# Altium PCB AQM_PCB.PcbDoc
Units mm, origin at the board's own origin, x right, y up, seen from the top; angles counter-clockwise.
Board outline 105 x 56 mm, 2 copper layers (Top Layer, Bottom Layer); 93 components, 68 nets, 343 pads, 94 vias.
Unrouted connection lines stored in the file: 19.
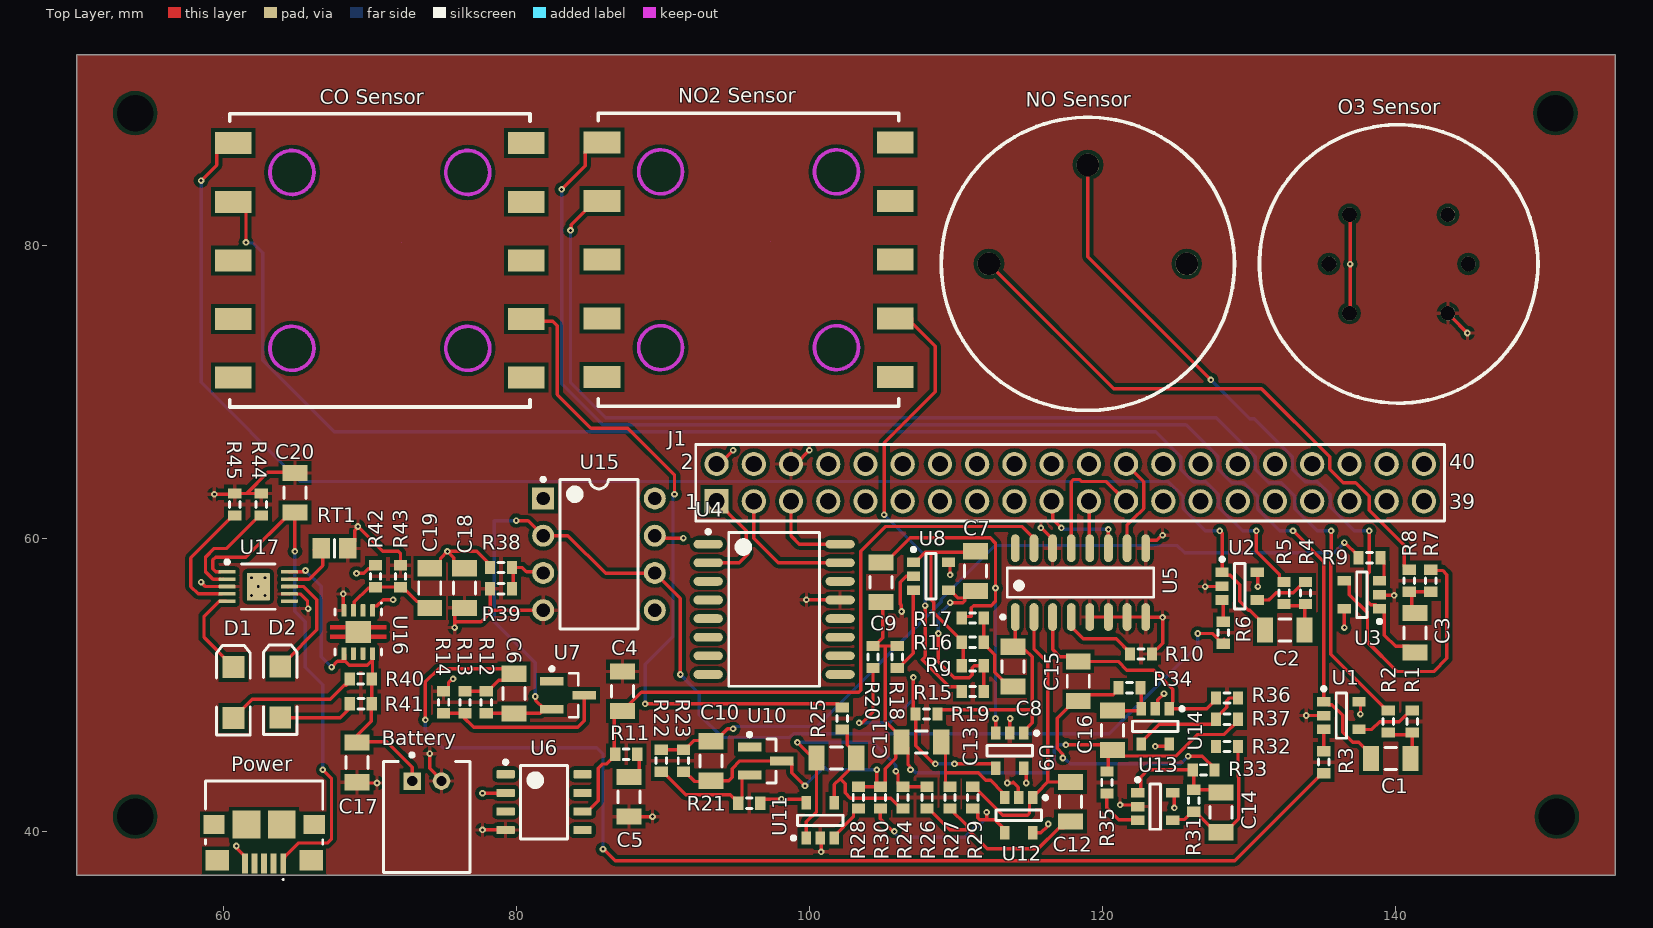
[diagram p0: Top Layer view]
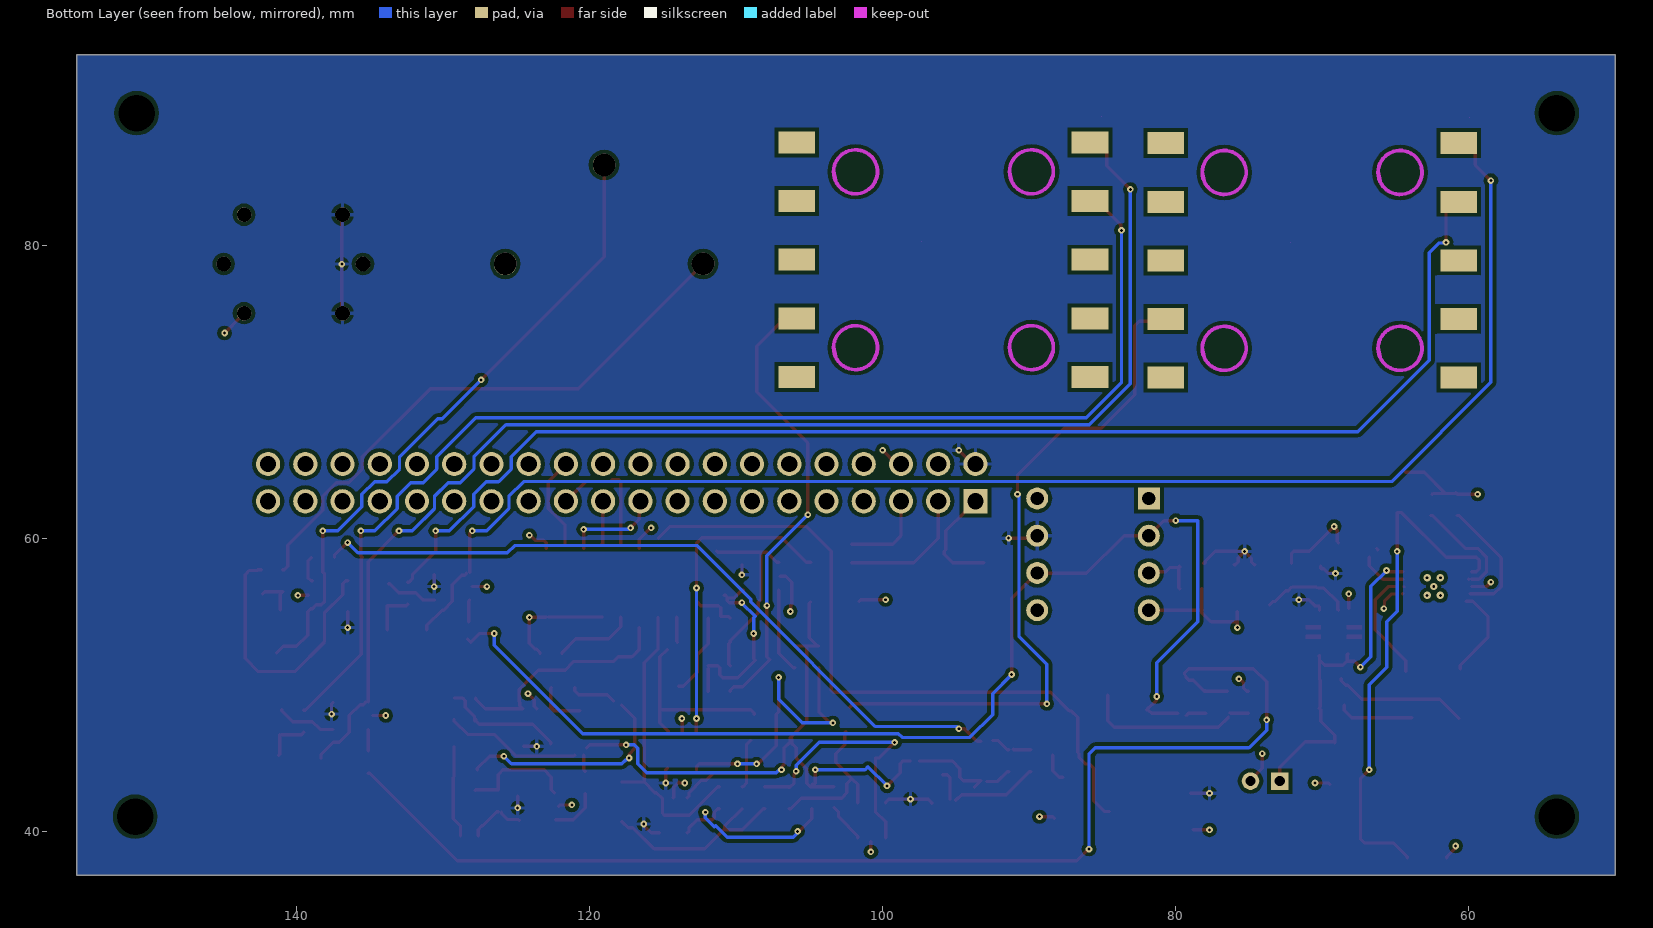
[diagram p1: Bottom Layer view, seen from below]

## Layer stack, top to bottom
Top Solder: solder mask 0.0102, Solder Resist, Dk 3.5
Top Layer: signal copper 0.0356
Dielectric 1: dielectric 0.32, FR-4, Dk 4.8
Bottom Layer: signal copper 0.0356
Bottom Solder: solder mask 0.0102, Solder Resist, Dk 3.5

## Board outline
50,93 155,93 155,37 50,37

## Design rules (kind name [scope] priority, off if disabled: settings)
Clearance [All] p1: gap=0.254 ignorepadtopadclearanceinfootprint=FALSE except(0: Arc-Hole Track-Hole SMDPad-Hole THPad-Hole Via-Hole Fill-Hole Poly-Hole Region-Hole Text-Hole)
DiffPairsRouting [All] p1: maxlimit=0.229 minlimit=0.229 mostfreqgap=0.229 toplayer_minwidth=0.229 toplayer_maxwidth=0.229 toplayer_prefwidth=0.229 bottomlayer_minwidth=0.229 bottomlayer_maxwidth=0.229 bottomlayer_prefwidth=0.229 maxuncoupledlength=12.7
PolygonConnect [All] p1: connectstyle=Relief reliefconductorwidth=0.254 reliefentries=4 polygonreliefangle="90 Angle" airgapwidth=0.254
RoutingVias [All] p1: holewidth=0.2 width=0.45 viastyle="Through Hole" minholewidth=0.2 minwidth=0.45 maxholewidth=0.2 maxwidth=0.45
SolderMaskExpansion [All] p1: expansion=0.102 istentingtop=FALSE
Width [All] p1: maxlimit=0.229 minlimit=0.229 preferedwidth=0.229 minimp=50.000000 maximp=50.000000 favimp=50.000000
29 further rules are at their usual default settings.

## Classes and differential pairs
component class "NO Output Processing": C14 C15 C16 R31 R32 R33 R34 R35 R36 R37 U13 U14
component class "300mV Ref Voltage": C10 R21 R22 R23 U10
component class "ADC + Pi": C4 C5 J1 R11 U4 U5 U6
component class O3: R10
component class NO: C3 "NO Sensor" R7 R8 R9 U3
component class NO2: C1 "NO2 Sensor" R1 R2 R3 U1
component class CO: C2 "CO Sensor" R4 R5 R6 U2
component class "Virtual Ground": R38 R39 U15
component class "NO2 Output Processing": C7 C8 C9 R15 R16 R17 R18 R19 R20 Rg U8 U9
component class "CO Output Processing": C11 C12 C13 R24 R25 R26 R27 R28 R29 R30 U11 U12
component class Battery: Battery C17 C18 C19 C20 D1 D2 Power R40 R41 R42 R43 R44 R45 RT1 U16 U17
component class "-200mV Ref Voltage": C6 R12 R13 R14

## Components (designator, comment, footprint, x,y, rotation, side; value= is the part's Value field where it differs from the comment)
Battery "S2B-PH-K-S(LF)(SN)" JST-S2B-PH-K-S_V 73.9,40.978 r0 top (schematic designator "Battery Connector")
C1 "Cap Semi" C1206 139.668,44.97 r0 top value=100nF
C2 "Cap Semi" C1206 132.445,53.75 r0 top value=100nF
C3 "Cap Semi" C1206 141.329,53.541 r90 top value=100nF
C4 "Cap Semi" C1206 87.254,49.56 r270 top value=10uF
C5 "Cap Semi" C1206 87.7,42.352 r90 top value=47uF
C6 "Cap Semi" C1206 79.854,49.4 r90 top value=100nF
C7 "Cap Semi" C1206 111.329,57.758 r90 top value=100nF
C8 "Cap Semi" C1206 113.9,51.24 r90 top value=10nF
C9 "Cap Semi" C1206 104.9,57 r90 top value=10nF
C10 "Cap Semi" C1206 93.3,44.8 r90 top value=100nF
C11 "Cap Semi" C1206 101.85,45 r180 top value=100nF
C12 "Cap Semi" C1206 117.808,42.02 r90 top value=10nF
C13 "Cap Semi" C1206 107.645,46.095 r0 top value=10nF
C14 "Cap Semi" C1206 128.083,41.29 r90 top value=100nF
C15 "Cap Semi" C1206 118.345,50.24 r90 top value=10nF
C16 "Cap Semi" C1206 120.67,46.886 r90 top value=10nF
C17 "Cap Semi" C1206 69.143,44.7 r90 top value=1uF
C18 "Cap Semi" C1206 76.464,56.6 r90 top value=1uF
C19 "Cap Semi" C1206 74.1,56.6 r90 top value=1uF
C20 "Cap Semi" C1206 64.9,63.1 r270 top value=1uF
"CO Sensor" "CO Sensor" Spec_Sensor 70.945,78.954 r0 top (schematic designator "CO Sensor1")
D1 "LED2" 3.2X1.6X1.1 60.704,49.471 r90 top
D2 "LED2" 3.2X1.6X1.1 63.9,49.5 r90 top
J1 "61304021121" 61304021121 117.799,63.789 r0 top
"NO2 Sensor" "NO2 Gas Sensor" Spec_Sensor 96.1,79 r0 top (schematic designator NO1)
"NO Sensor" "NO Sensor" NO_Sensor 119,78.719 r0 top (schematic designator "NO Sensor1")
"O3 Sensor" "O3 Sensor" O3_Sensor 140.208,78.71 r0 top (schematic designator O1)
Power "1981568-1" TECO-1981568-5_V 62.8,37.799 r180 top (schematic designator "USB Port")
R1 "Res3" J1-0603 141.129,47.5 r270 top value=10K
R2 "Res3" J1-0603 139.5,47.5 r90 top value=10K
R3 "Res3" J1-0603 135.1,44.72 r90 top value=10K
R4 "Res3" J1-0603 133.845,56.254 r270 top value=10K
R5 "Res3" J1-0603 132.391,56.254 r90 top value=10K
R6 "Res3" J1-0603 128.245,53.554 r90 top value=10K
R7 "Res3" J1-0603 142.4,57.096 r270 top value=10K
R8 "Res3" J1-0603 140.929,57.096 r90 top value=10K
R9 "Res3" J1-0603 138.225,58.671 r0 top value=10K
R10 "Res3" J1-0603 122.627,52.1 r180 top value=100K
R11 "Res3" J1-0603 87.5,45.256 r180 top value=1K
R12 "Res3" J1-0603 77.954,48.8 r270 top value=1.2K
R13 "Res3" J1-0603 76.5,48.8 r90 top value=6.2K
R14 "Res3" J1-0603 75.045,48.8 r270 top value=4.7K
R15 "Res3" J1-0603 111.145,49.537 r0 top value=150
R16 "Res3" J1-0603 111.145,52.9 r0 top value=10K
R17 "Res3" J1-0603 111.145,54.554 r180 top value=10K
R18 "Res3" J1-0603 106,51.9 r270 top value=150
R19 "Res3" J1-0603 108,48 r0 top value=20K
R20 "Res3" J1-0603 104.345,51.9 r270 top value=1K
R21 "Res3" J1-0603 95.9,41.921 r180 top value=4.7K
R22 "Res3" J1-0603 89.9,44.821 r90 top value=6.8K
R23 "Res3" J1-0603 91.404,44.821 r270 top value=2.2K
R24 "Res3" J1-0603 106.383,42.3 r90 top value=100K
R25 "Res3" J1-0603 102.245,47.7 r270 top value=150
R26 "Res3" J1-0603 108.037,42.3 r270 top value=10K
R27 "Res3" J1-0603 109.591,42.3 r90 top value=10K
R28 "Res3" J1-0603 103.345,42.3 r270 top value=150
R29 "Res3" J1-0603 111.145,42.3 r90 top value=20K
R30 "Res3" J1-0603 104.845,42.3 r270 top value=10K
R31 "Res3" J1-0603 126.229,42.09 r90 top value=10K
R32 "Res3" J1-0603 128.5,45.79 r0 top value=150
R33 "Res3" J1-0603 126.9,44.195 r0 top value=10K
R34 "Res3" J1-0603 121.85,49.79 r0 top value=10K
R35 "Res3" J1-0603 120.3,43.332 r270 top value=150
R36 "Res3" J1-0603 128.5,49.099 r180 top value=10K
R37 "Res3" J1-0603 128.5,47.645 r180 top value=10K
R38 "Res3" J1-0603 78.968,57.999 r180 top value=100K
R39 "Res3" J1-0603 78.968,56.545 r0 top value=100K
R40 "Res3" J1-0603 69.388,50.4 r0 top value=976K
R41 "Res3" J1-0603 69.4,48.7 r0 top value=976K
R42 "Res3" J1-0603 70.4,57.4 r90 top value=79K
R43 "Res3" J1-0603 72.1,57.4 r270 top value=25K
R44 "Res3" J1-0603 62.6,62.3 r270 top value=1K
R45 "Res3" J1-0603 60.8,62.3 r270 top value=2K
Rg "Res3" J1-0603 111.145,51.291 r180 top value=100K (schematic designator R_gain_NO2)
RT1 "Res Thermal" 6-0805_N 67.6,59.3 r0 top
U1 "MCP601T-I/OT" SOT-23-OT5_L 136.3,47.9 r0 top
U2 "MCP601T-I/OT" SOT-23-OT5_L 129.362,56.733 r0 top
U3 "MCP601T-I/OT" SOT-23-OT5_L 137.7,56.141 r180 top
U4 "DS3231SN" W16-H2_L 97.6,55.148 r0 top
U5 "MCP3008-I/SL" SOIC-SL16_L 118.5,56.97 r90 top
U6 "REF5025AIDR" D0008A_L 81.9,41.99 r0 top
U7 "LM4041CIM3-ADJ/NOPB" MF03A_M 83.533,49.284 r0 top
U8 "MCP601T-I/OT" SOT-23-OT5_L 108.3,57.4 r0 top
U9 "MCP601T-I/OT" SOT-23-OT5_L 113.679,45.5 r270 top
U10 "LM4041CIM3-ADJ/NOPB" MF03A_M 97.02,44.8 r0 top
U11 "MCP601T-I/OT" SOT-23-OT5_L 100.745,40.746 r90 top
U12 "MCP601T-I/OT" SOT-23-OT5_L 114.279,41.1 r270 top
U13 "MCP601T-I/OT" SOT-23-OT5_L 123.6,41.69 r0 top
U14 "MCP601T-I/OT" SOT-23-OT5_L 123.6,47.161 r270 top
U15 "LM741CN/NOPB" P0008A 85.647,58.899 r0 top
U16 "TPS73701DRBR" DRB0008A_V 69.22,53.6 r270 top
U17 "BQ24092DGQT" DGQ0010D_L 62.4,56.7 r0 top

## Footprints (in the part's own frame and the unit in brackets; to place one, negate y for a bottom-side part, rotate by r counter-clockwise, add the part's x,y. Pads: shape width x height; smd on the part's side, far side on the other; paste and mask are expansions set on the pad)
3.2X1.6X1.1 [mm] "SMT LED; 2 Flat Leads"
  rect 1.5x1.5 smd: 1(-1.75,0) 2(1.75,0)
  silkscreen extent -2.9,-1.15 3.2,1.15
6-0805_N [mm] "Chip Resistor, Body 2.0x1.2mm, IPC Medium Density"
  rect 1.2x1.4 smd: 1(-0.9,0) 2(0.9,0)
  silkscreen extent 0,-0.6 0,0.6, body extent -1.07,-0.7 1.07,0.7, height 0.7
61304021121 [mm] "Pin Header, pitch 2.54 mm, THT, Vertical, dual row, 40p"
  rect 1.65x1.65 hole 1.1: 1(-24.13,-1.27)
  round 1.65 hole 1.1: 2(-24.13,1.27) 3(-21.59,-1.27) 4(-21.59,1.27) 5(-19.05,-1.27) 6(-19.05,1.27) 7(-16.51,-1.27) 8(-16.51,1.27) 9(-13.97,-1.27) 10(-13.97,1.27) 11(-11.43,-1.27) 12(-11.43,1.27) 13(-8.89,-1.27) 14(-8.89,1.27) 15(-6.35,-1.27) 16(-6.35,1.27) 17(-3.81,-1.27) 18(-3.81,1.27) 19(-1.27,-1.27) 20(-1.27,1.27) 21(1.27,-1.27) 22(1.27,1.27) 23(3.81,-1.27) 24(3.81,1.27) 25(6.35,-1.27) 26(6.35,1.27) 27(8.89,-1.27) 28(8.89,1.27) 29(11.43,-1.27) 30(11.43,1.27) 31(13.97,-1.27) 32(13.97,1.27) 33(16.51,-1.27) 34(16.51,1.27) 35(19.05,-1.27) 36(19.05,1.27) 37(21.59,-1.27) 38(21.59,1.27) 39(24.13,-1.27) 40(24.13,1.27)
  silkscreen extent -25.55,-2.61 25.55,2.61, body extent -25.4,-2.54 25.4,2.54, height 8.59
C1206 [mm] "Chip Capacitor, Body 3.2x1.6mm, IPC High Density"
  rect 1.1x1.7 smd: 1(-1.35,0) 2(1.35,0)
  silkscreen extent -0.4,-0.75 0.4,0.75, body extent -1.7,-0.9 1.7,0.9, height 1.3
D0008A_L [mm] "SOIC, 8-Leads, Body 5x4mm, Pitch 1.27mm, IPC High Density"
  rrect18% 1.25x0.55 smd: 1(-2.625,1.905) 2(-2.625,0.635) 3(-2.625,-0.635) 4(-2.625,-1.905) 5(2.625,-1.905) 6(2.625,-0.635) 7(2.625,0.635) 8(2.625,1.905)
  silkscreen extent -2.75,-2.5 1.6,2.85, body extent -3,-2.45 3,2.45, height 1.63
DGQ0010D_L [mm] "TSOP, 10-Leads, Body 3.1x3.1mm, Pitch 0.5mm, Thermal Pad 1.88x1.57mm, IPC High Density"
  rrect40% 1.15x0.25 smd: 1(-2.125,1) 2(-2.125,0.5) 3(-2.125,0) 4(-2.125,-0.5) 5(-2.125,-1) 6(2.125,-1) 7(2.125,-0.5) 8(2.125,0) 9(2.125,0.5) 10(2.125,1)
  rrect6% 1.57x1.88 smd: 11(0,0)
  silkscreen extent -2.25,-1.55 1.15,1.8, body extent -2.45,-1.5 2.45,1.5, height 0.94
DRB0008A_V [mm] "SON, 8-Leads, Body 3x3mm, Pitch 0.65mm, Thermal Pad 1.50 x 3.8mm"
  rrect29% 0.85x0.35 smd: 1(-1.475,0.975) 2(-1.475,0.325) 3(-1.475,-0.325) 4(-1.475,-0.975) 5(1.475,-0.975) 6(1.475,-0.325) 7(1.475,0.325) 8(1.475,0.975)
  rrect7% 1.5x1.75 smd: 9(0,0)
  Top Layer region: 0.185,0.875 0.185,1.9 0.465,1.9 0.465,0.875
  Top Layer region: -0.185,-0.875 -0.185,-1.9 -0.465,-1.9 -0.465,-0.875
  Top Layer region: 0.185,-0.875 0.185,-1.9 0.465,-1.9 0.465,-0.875
  Top Layer region: -0.185,0.875 -0.185,1.9 -0.465,1.9 -0.465,0.875
  silkscreen extent -2.02,-1.58 1.57,1.62, body extent -1.5,-1.5 1.5,1.5, height 1
J1-0603 [mm] "Chip Resistor, Body 1.6x0.8mm, IPC High Density"
  rect 0.7x0.9 smd: 1(-0.75,0) 2(0.75,0)
  silkscreen extent -0.2,-0.35 0.2,0.35, body extent -0.85,-0.48 0.85,0.48, height 0.9
JST-S2B-PH-K-S_V [mm] "THD, 2-Leads, Body 7.6x5.9mm, Pitch 2mm"
  rect 1.2x1.2 hole 0.7: 1(-1,2.45)
  round 1.2 hole 0.7: 2(1,2.45)
  silkscreen extent -2.95,-3.8 2.95,4.35, body extent -2.95,-3.8 2.95,3.8, height 4.8
MF03A_M [mm] "SOT23, 3-Leads, Body 2.9x1.3mm, Pitch 0.95mm, Lead Span 2.4mm, IPC Low Density"
  rect 1.6x0.6 smd: 1(-1.1,0.95) 2(-1.1,-0.95) 3(1.1,0)
  silkscreen extent -1.22,-1.5 0.7,1.92, body extent -0.7,-1.52 0.7,1.52, height 1.12
NO_Sensor [mm] "GS+4NO"
  round 1.55 hole 1.55: 1(-6.75,0) 2(0,6.75) 3(6.75,0)
  silkscreen extent -10,-10 10,10
O3_Sensor [mm] "MQ131"
  round 1 hole 1: 1(-3.359,3.359) 2(-4.75,0) 3(-3.359,-3.359) 4(3.359,-3.359) 5(4.75,0) 6(3.359,3.359)
  silkscreen extent -9.5,-9.5 9.5,9.5
P0008A [mm] "DIP, 8-Leads, Body 10.15x6.6mm, Pitch 2.54mm"
  rect 1.5x1.5 hole 0.9: 1(-3.81,3.81)
  round 1.5 hole 0.9: 2(-3.81,1.27) 3(-3.81,-1.27) 4(-3.81,-3.81) 5(3.81,-3.81) 6(3.81,-1.27) 7(3.81,1.27) 8(3.81,3.81)
  silkscreen extent -3.93,-5.1 2.65,5.23, body extent -3.95,-5.07 3.95,5.07, height 5.08
SOIC-SL16_L [mm] "SOIC, 16-Leads, Body 9.9x3.9mm, Pitch 1.27mm, IPC High Density"
  oval 1.9x0.6 smd: 1(-2.35,4.445) 2(-2.35,3.175) 3(-2.35,1.905) 4(-2.35,0.635) 5(-2.35,-0.635) 6(-2.35,-1.905) 7(-2.35,-3.175) 8(-2.35,-4.445) 9(2.35,-4.445) 10(2.35,-3.175) 11(2.35,-1.905) 12(2.35,-0.635) 13(2.35,0.635) 14(2.35,1.905) 15(2.35,3.175) 16(2.35,4.445)
  silkscreen extent -2.47,-5 1,5.42, body extent -2,-5 2,5, height 1.75
SOT-23-OT5_L [mm] "SOT23, 5-Leads, Body 2.9x1.7mm, Pitch 0.95mm, Lead Span 2.8mm, IPC High Density"
  rect 0.9x0.65 smd: 1(-1.2,0.95) 2(-1.2,0) 3(-1.2,-0.95) 4(1.2,-0.95) 5(1.2,0.95)
  silkscreen extent -1.32,-1.55 0.35,1.95, body extent -0.9,-1.55 0.9,1.55, height 1.45
Spec_Sensor [mm] "Spec sensor package"
  rect 2.5x1.5 all layers, no hole mask+0.25: 1(-10.25,-8) 2(-10.25,-4) 3(-10.25,0) 4(-10.25,4) 5(-10.25,8) 6(9.75,8) 7(9.75,4) 8(9.75,0) 9(9.75,-4) 10(9.75,-8)
  Keep-Out Layer circle w0.254: c5.75,-6 r1.5
  Keep-Out Layer circle w0.254: c5.75,6 r1.5
  Keep-Out Layer circle w0.254: c-6.25,6 r1.5
  Keep-Out Layer circle w0.254: c-6.25,-6 r1.5
  Keep-Out Layer region: -11,9.75
  Keep-Out Layer region: 5.75,-7.5 5.25,-7.5 5,-7.25 4.625,-6.875 4.25,-6 4.375,-5.375 5,-4.75 5.75,-4.5 6.75,-4.75 7.25,-5.583 7,-6.75 6.75,-7.25
  Keep-Out Layer region: 5.75,4.5 5.25,4.5 5,4.75 4.625,5.125 4.25,6 4.375,6.625 5,7.25 5.75,7.5 6.75,7.25 7.25,6.417 7,5.25 6.75,4.75
  Keep-Out Layer region: -6.25,4.5 -6.75,4.5 -7,4.75 -7.375,5.125 -7.75,6 -7.625,6.625 -7,7.25 -6.25,7.5 -5.25,7.25 -4.75,6.417 -5,5.25 -5.25,4.75
  Keep-Out Layer region: -6.25,-7.5 -6.75,-7.5 -7,-7.25 -7.375,-6.875 -7.75,-6 -7.625,-5.375 -7,-4.75 -6.25,-4.5 -5.25,-4.75 -4.75,-5.583 -5,-6.75 -5.25,-7.25
  Keep-Out Layer region: 1.25,1.25
  silkscreen extent -10.5,-10 10,10
TECO-1981568-5_V [mm] "SMD, 5-Leads, Body 8x5.9mm, Pitch 0.65mm"
  rect 0.4x1.35 smd: 1(-1.3,0) 2(-0.65,0) 3(0,0) 4(0.65,0) 5(1.3,0)
  rect 1.6x1.4 smd: 6(-3.2,-0.225) 7(3.2,-0.225)
  rect 1.45x1.3 smd: 8(-3.425,-2.675) 9(3.425,-2.675)
  rect 1.9x1.9 smd: 10(-1.2,-2.675) 11(1.2,-2.675)
  silkscreen extent -4,-5.62 4,1.12, body extent -4,-5.63 4,0.28, height 3
W16-H2_L [mm] "SOIC, 16-Leads, Body 10.3x7.5mm, Pitch 1.27mm, IPC High Density"
  oval 2x0.6 smd: 1(-4.5,4.445) 2(-4.5,3.175) 3(-4.5,1.905) 4(-4.5,0.635) 5(-4.5,-0.635) 6(-4.5,-1.905) 7(-4.5,-3.175) 8(-4.5,-4.445) 9(4.5,-4.445) 10(4.5,-3.175) 11(4.5,-1.905) 12(4.5,-0.635) 13(4.5,0.635) 14(4.5,1.905) 15(4.5,3.175) 16(4.5,4.445)
  silkscreen extent -4.62,-5.25 3.1,5.42, body extent -3.8,-5.25 3.8,5.25, height 2.65

## Part data
Battery: library part CMP-1755-00004-1, "Male Header, Pitch 2 mm, 1 x 2 Position, Height 4.8 mm, Tail Length 3.4 mm, -25 to 85 degC, RoHS, Bulk", Capacitance="10 uF", Case\Package=Radial, Max Operating Temperature="85 degC", Min Operating Temperature="-40 degC", Package Quantity=200, Tolerance=20%, Voltage Rating="50 V", ComponentLink1Description=Datasheet, ComponentLink1URL=http://www.jst-mfg.com/product/pdf/eng/ePH.pdf, DatasheetVersion=Dec-12, Diameter="5 mm", Height="11 mm", Lead Pitch="2 mm", Length="11 mm", Mount="Through Hole", PackageDescription="Male Header, Pitch 2 mm, 1 x 2 Position, Height 4.8 mm, Tail Length 3.4 mm", PackageReference=S2B-PH-K-S, Packaging=Bulk, Pins=2, Radiation Hardening=No, REACH SVHC="No SVHC", RoHSCompliant=true, Voltage Rating (DC)="50 V"
C1 C2 C3 C4 C5 C6 C7 C8 C9 C10 C11 C12 C13 C14 C15 C16 C17 C18 C19 C20: "Capacitor (Semiconductor SIM Model)", LatestRevisionDate=29-May-2009, LatestRevisionNote="IPC-7351 Footprint Added.", PackageDescription="Chip Capacitor", PackageReference=C1206, Published=8-Jun-2000, Publisher="Altium Limited"
"CO Sensor": library part 3SP_CO_1000, "3SP_CO_1000 Package 110-109"
D1 D2: "Typical RED, GREEN, YELLOW, AMBER GaAs LED", LatestRevisionDate=17-Jul-2002, LatestRevisionNote="Re-released for DXP Platform.", PackageDescription="SM LED; 2 Flat Leads", PackageReference=3.2X1.6X1.1, PackageVersion=Feb-2002, Published=8-Jun-2000, Publisher="Altium Limited"
J1: library part CMP-1502-01135-1, "THT Vertical Pin Header WR-PHD, Pitch 2.54 mm, Dual Row, 40 pins", Contact Resistance=20mOhm, Manufacturer="Wurth Elektronik", Operating Temperature=-40to105degC, Rated Current=3A, Withstanding Voltage=500VAC, Working Voltage=250VAC, Datasheet URL=https://katalog.we-online.de/em/datasheet/6130xx21121.pdf, Gender=Male, Manufacturer URL=http://www.we-online.de, Mounting Technology=THT, Orientation=Vertical, Package Reference=61304021121, Packaging=Bag, Part Number=61304021121, Pin Number=40, Pitch=2.54mm, Publisher=WurthElektronik, Row Number=Dual
"NO2 Sensor": library part "3SP_NO2_5F C", "3SP_NO2_5F C Package 110-508"
"NO Sensor": library part GS+4NO
"O3 Sensor": library part MQ131
Power: library part CMP-2000-05408-1, "Micro USB Receptacle Standard Type B Assy, 5-Pin SMD, RoHS, Tape and Reel", Current Rating (Max)=1/ContactA, Manufacturer="TE Connectivity", Operating Temp Range=-55Cto85C, Operating Temperature Max Deg. C=85C, Operating Temperature Min Deg. C=-55C, Voltage Rating Max=30VAC, Body Orientation=RightAngle, Contact Material=CopperAlloy, Contact Plating=GoldOverNickel, Datasheet URL=http://www.mouser.com/ds/2/418/NG_CD_1981568_E2-621296.pdf, Datasheet Version="Rev. E2, 08/2015", Gender=RCP, Housing Material=Thermoplastic, Manufacturer URL=http://www.te.com/, Mounting Style=SurfaceMount, Number of Contacts=5POS, Number of Ports=1Port, Number of Terminals=5, Packaging=TapeandReel, Pitch (mm)=0.65mm, Product Depth (mm)=5.6mm, Product Height (mm)=3mm, Product Length (mm)=8mm, Termination Method=Solder, Type=MicroUSB
R1 R2 R3 R4 R5 R6 R7 R8 R9 R10 R11 R12 R13 R14 R15 R16 R17 R18 R19 R20 R21 R22 R23 R24 R25 R26 R27 R28 R29 R30 R31 R32 R33 R34 R35 R36 R37 R38 R39 R40 R41 R42 R43 R44 R45 Rg: "Resistor", LatestRevisionDate=29-May-2009, LatestRevisionNote="IPC-7351 Footprint Added.", PackageDescription="Chip Resistor", PackageReference=J1-0603, Published=8-Jun-2000, Publisher="Altium Limited"
RT1: "Thermistor", Code_IPC=RESC2012, LatestRevisionDate=29-May-2009, LatestRevisionNote="IPC-7351 Footprint Added.", PackageDescription="Chip Resistor 0805 Case Size", PackageReference=6-0805, PackageVersion=Mar-2003, Published=24-Mar-1999, Publisher="Altium Limited"
U1 U2 U3 U8 U9 U11 U12 U13 U14: library part CMP-0187-00433-2, "2.7V to 6.0V Single Supply CMOS Operational Amplifier, 5-Pin SOT-23, Industrial Temperature, Tape and Reel", Code_IPC=SOT23-5, ComponentLink1Description="Manufacturer URL", ComponentLink1URL=http://www.microchip.com/, ComponentLink2Description=Datasheet, ComponentLink2URL=http://ww1.microchip.com/downloads/en/DeviceDoc/21314g.pdf, ComponentLink3Description="Package Specification", ComponentLink3URL=http://www.microchip.com/stellent/groups/techpub_sg/documents/packagingspec/en012702.pdf, DatasheetVersion="revG, Dec-2007", PackageDescription="5-Lead Plastic Small Outline Transistor (OT) [SOT-23]", PackageReference=SOT-23-OT5, PackageVersion="revBB, Aug-2009", RevisionNote="URLs added."
U4: library part CMP-0254-00293-1, "Extremely Accurate I2C-Integrated Real-Time Clock/TCXO/Crystal, 16-Pin SO, -40 to 85 degC", Code_IPC=SOIC127P1030-16, Code_JEDEC=MS-013-AA, ComponentLink1Description="Manufacturer URL", ComponentLink1URL=http://www.maxim-ic.com, ComponentLink2Description=Datasheet, ComponentLink2URL=http://datasheets.maxim-ic.com/en/ds/DS3231.pdf, ComponentLink3Description="Package Specification", ComponentLink3URL=http://pdfserv.maxim-ic.com/package_dwgs/21-0042.PDF, DatasheetVersion="Rev 8, Jul-2010", PackageDescription="16-Pin Small-Outline IC, Wide (0.3in), 1.27 mm Pitch, SOIC (W)", PackageReference=W16-H2, PackageVersion="revD, 2010"
U5: library part CMP-0188-00041-2, "2.7V 4-Channel/8-Channel 10-Bit A/D Converters with SPI Serial Interface, 16-Pin SOIC 150mil, Industrial Temperature", Code_IPC=SOIC127P600-16, Code_JEDEC=MS-012-AC, ComponentLink1Description="Manufacturer URL", ComponentLink1URL=http://www.microchip.com/, ComponentLink2Description=Datasheet, ComponentLink2URL=http://ww1.microchip.com/downloads/en/DeviceDoc/21295d.pdf, ComponentLink3Description="Package Specification", ComponentLink3URL=http://www.microchip.com/stellent/groups/techpub_sg/documents/packagingspec/en012702.pdf, DatasheetVersion="revD, Dec-2008", PackageDescription="16-Lead Plastic Small Outline (SL) - Narrow, 3.90mm Body [SOIC]", PackageReference=SOIC-SL16, PackageVersion="revBB, Aug-2009", RevisionNote="URLs added."
U6: library part CMP-0367-00041-2, "Low Noise, Very Low Drift, Precision Voltage Reference, -40 to 125 degC, 8-pin SOIC (D), Green (RoHS & no Sb/Br)", Manufacturer="Texas Instruments", Rating=Military, Temp Coeff(Max)(ppm/ degree C)=3, Code_JEDEC=MS-012, ComponentLink1Description="Manufacturer URL", ComponentLink1URL=http://www.ti.com/, ComponentLink2Description=Datasheet, ComponentLink2URL=http://www.ti.com/general/docs/lit/getliterature.tsp?genericPartNumber=REF5025&fileType=pdf, ComponentLink3Description="Package Specification", ComponentLink3URL=http://www.ti.com/litv/pdf/msoi002j, DatasheetVersion=SBOS410E, Eco-Plan="Green (RoHS & no Sb/Br)", Initial Accuracy @ 25/deg C(%)=0.05, Iout/Iz(Max)(mA)=10, Iq(Max)(uA)=1000, Mounting Technology="Surface Mount", PackageDescription="8-Pin Plastic Small Outline, Body 4.9 x 3.9 mm, Pitch 1.27 mm", PackageReference=D0008A, PackageVersion=4040047-3/M, PartNumber=REF5025AIDR, SubFamily="Series Voltage Reference", VI(Max)(V)=18, VI(Min)(V)=2.7, VO(V)=2.5
U7 U10: library part CMP-0074-00728-2, "Precision Micropower Shunt Voltage Reference, 3-pin SOT-23, Pb-Free", Manufacturer="National Semiconductor", PackageTopMarking=RAC*XTT, PowerWise=N, ComponentLink1Description="LM4041 Datasheet", ComponentLink1URL=http://www.national.com/ds/LM/LM4041.pdf, ComponentLink2Description="LM4041 Web Page", ComponentLink2URL=http://www.national.com/pf/LM/LM4041.html, ComponentLink3Description="MF03A Package Page", ComponentLink3URL=http://www.national.com/packaging/folders/mf03a.html, CompType="Voltage Reference IC", DatasheetVersion=Mar-2005, PackageDescription="Molded SOT-23, .115 x .051 x .037in Body, 3 Lead, .075 in Pitch", PackageReference=MF03A, PackageVersion="revB, Mar-2003", PinCount=3, RevisionNote="Component URLs added", RoHS=Y
U15: library part CMP-0055-00162-3, "Operational Amplifier, 8-pin MDIP, Pb-Free", Manufacturer="Texas Instruments", Package Reference=P0008A, PackageTopMarking=NSUZXYTTE#*LM*741CN, PowerWise=N, Code_JEDEC=MS-001-BA, ComponentLink1Description="Datasheet URL", ComponentLink1URL=http://www.ti.com/general/docs/lit/getliterature.tsp?genericPartNumber=LM741&fileType=pdf, CompType=Amplifiers, PackageDescription="MDIP, .365 x .250 x .130in, 8 Lead, .100in Pitch", PinCount=8, RoHS=Y
U16: library part CMP-0395-00601-2, "Single Output LDO, 1 A, Adjustable 1.2 to 5.5 V Output, 2.2 to 5.5 V Input, with Reverse Current Protection, 8-pin SON (DRB), -40 to 125 degC, Green (RoHS & no Sb/Br)", Manufacturer="Texas Instruments", Rating=Catalog, Accuracy(%)=3, ComponentLink1Description="Manufacturer URL", ComponentLink1URL=http://www.ti.com/, ComponentLink2Description=Datasheet, ComponentLink2URL=http://www.ti.com/general/docs/lit/getliterature.tsp?genericPartNumber=TPS73701&fileType=pdf, ComponentLink3Description="Package Specification", ComponentLink3URL=http://www.ti.com/litv/pdf/mpds118h, DatasheetVersion=SBVS067O, Eco-Plan="Green (RoHS & no Sb/Br)", Iout(Max)(A)=1, Iq(Typ)(mA)=0.3, Mounting Technology="Surface Mount", PackageDescription="8-Pin Plastic Small Outline, Body 3 x 3 mm, Pitch 0.65 mm", PackageReference=DRB0008A, PackageVersion=4203482-2/K, PartNumber=TPS73701DRBR, SubFamily="Single Channel LDO", Vdo(Typ)(mV)=130, Vin(Max)(V)=5.5, Vin(Min)(V)=2.2, Vout Adj(Max)(V)=5.5, Vout Adj(Min)(V)=1.2
U17: library part CMP-0321-00905-2, "1 A, Single-Input, Single-Cell Li-Ion Battery Charger with Operation Over JEITA and 10 k ohm NTC, 4.5 V, -40 to 150 degC, 10-pin MSOP-PowerPAD (DGQ), Green (RoHS & no Sb/Br)", Manufacturer="Texas Instruments", Over Voltage Protection=N, Code_JEDEC=MO-187-BA-T, ComponentLink1Description=Datasheet, ComponentLink1URL=http://www.ti.com/general/docs/lit/getliterature.tsp?genericPartNumber=BQ24092&fileType=pdf, DatasheetVersion=SLUS968C, Eco-Plan="Green (RoHS & no Sb/Br)", Lead Acid=N, Li-Ion=N, Li-Polymer=N, Mounting Technology="Surface Mount", NiCd=N, NiMH=N, PackageDescription="10-Pin PowerPAD Plastic Small Outline 0.5 mm Pitch, Exposed Pad", PackageReference=DGQ0010D, PackageVersion="revF, Nov-2011", PartNumber=BQ24092DGQT, SubFamily="Battery Charge Management", Vin(Min)(V)=4.5

## Free pads (board coordinates)
  round 1.524 hole 2.5 mask+2: 13(54,89) 13(54,41) 13(150.9,89) 13(151,41)

## Via types
v1: diameter 0.45, hole 0.2, Top Layer to Bottom Layer, 89 vias
v2: diameter 0.5, hole 0.2, Top Layer to Bottom Layer, 5 vias

## Nets (pads, with @x,y where several pads share a name; then routed paths per layer and width w, separated by ;. In a path a pad name is that pad's centre, name@x,y a point inside that pad or via, vN(x,y) a via of type N, cw(c..) or ccw(c..) an arc to the next point about the centre after c; other vN are vias at no path point)
GND: "O3 Sensor.4" Battery.2 C4.1 C5.1 C17.1 C18.1 C20.1 J1.6 Power.5 R10.1 R14.1 R39.1 R43.1 R44.1 R45.1 RT1.2 U1.2 U2.2 U3.2 U4.13 U5.5 U5.6 U5.7 U5.8 U5.9 U5.14 U6.4 U8.2 U9.2 U11.2 U12.2 U13.2 U14.2 U15.4 U16.4 U17.3 U17.7 | length 60
  Top Layer w0.229: v1(58.5,57) 58.8,56.7 U17.3@59.8,56.7 ; v1(59.4,63) 60.8,63 R45.1@60.85,63.05 ; R45.1 R45.1@60.85,63.05 ; v1(60.9,39) 60.942,38.958 60.942,38.832 61.5,38.275 Power.5@61.5,38.2 ; R45.1@60.9,63.1 R45.1@60.85,63.05 ; R44.1@62.5,63 62.45,63.05 61.6,63.05 ; C20.1@64.3,64.5 63.05,64.5 61.6,63.05 ; U17.7 U17.7@64.535,56.189 ; U17.7@64.9,56.2 64.911,56.189 65.311,56.189 65.758,55.742 65.758,55.242 v1(65.8,55.2) ; U16.4@68.2,55.2 v1(68.2,56.2) ; RT1.2@68.9,59.7 68.985,59.785 68.985,60.525 69.2,60.74 v1(69.2,60.8) 70.9,59.1 71.966,59.1 72.1,58.966 R43.1@72.1,58.3 ; C17.1@69.5,43.2 69.6,43.3 v1(70.5,43.3) ; v1(74.1,45.3) 74.1,44.3 Battery.2@74.9,43.5 ; R14.1 75.145,49.55 75.381,49.785 75.381,50.155 75.583,50.358 75.658,50.358 v1(75.7,50.4) ; v1(75.8,53.9) 75.8,54.3 ; C18.1@75.8,55 75.8,54.3 ; v1(77.7,40.1) U6.4@78.8,40.1 ; 78.2,55.1 78.211,55.089 78.218,55.089 ; R39.1 78.218,55.089 ; U15.4 78.218,55.089 ; C5.1@88.3,40.9 88.4,41 v1(89.3,41) ; J1.6 99.059,65.059 v1(100,66) ; v1(99.8,55.8) 101.5,55.8 U4.13@101.6,55.7 ; v1(100.8,38.6) U11.2@100.8,39.3 ; v1(106.3,55) 106.258,55.042 106.258,55.442 106.2,55.5 106.2,57 106.6,57.4 U8.2@107,57.4 ; v1(113.5,43.3) 113.86,43.3 113.9,43.34 114.247,42.993 114.247,42.332 U12.2 ; U9.2 113.679,47.598 113.681,47.6 v1@113.7,47.6 ; v1@115.9,60.7 115.888,60.688 115.888,60.644 116.595,59.938 U5.14 ; U5.5 U5.6 U5.7 U5.8@122.773,54.62 ; v1(121.2,41.8) 122,41.8 U13.2@122.1,41.7 ; U5.8 122.964,54.6 v1(124.1,54.6) ; U5.9 122.945,59.684 123.116,59.855 123.695,59.855 124.04,60.2 v1(124.1,60.2) ; R10.1 123.377,52.2 123.612,52.435 123.712,52.435 124.1,52.823 v1@124.1,54.5 ; U14.2 123.782,48.543 123.782,48.982 v1(124.2,49.4) ; v1(127,56.7) U2.2@128,56.7 ; v1(133.9,47.9) U1.2@134.8,47.9 ; U3.2@139.2,56.1 v1(139.9,56.1) ; 143.8,75.2 143.8,75.1 v1(144.9,74) ; R45.1@60.85,63.05 61.6,63.05 ; 75.8,54.3 77.6,54.3 78.218,54.918 78.218,55.089
  other v1: 113.7,47.7 115.8,60.7
NetBattery_1: Battery.1 C17.2 R40.2 R41.2 U16.5 U16.8 U17.10 | length 23.7
  Top Layer w0.229: U17.10 65.467,57.7 65.56,57.793 v1(65.62,57.793) ; v1(67.4,51.2) 67.404,51.2 67.804,51.6 68.3,51.6 ; U16.5 68.306,52.064 68.306,51.623 68.597,51.331 69.843,51.331 70.135,51.623 ; R40.2@70.138,50.3 70.195,50.356 70.195,51.623 70.195,51.895 U16.8@70.2,51.9 ; R41.2@70.15,48.5 R40.2@70.15,50.25 ; U16.8@70.195,51.995 U16.8@70.2,52 ; R41.2@70.2,48.4 70.1,48.3 70.1,47.5 69.143,46.543 C17.2 69.193,46.1 71.172,46.1 72.9,44.372 Battery.1
  Bottom Layer w0.229: v1(65.62,57.793) 66.7,56.713 66.7,51.9 v1(67.4,51.2)
NetC1_1: "NO2 Sensor.5" C1.1 U1.1 | length 91.2
  Top Layer w0.229: v1(83.1,83.8) 84.714,85.414 84.714,86.364 85.35,87 85.85,87 ; v1(133,60.5) 135.1,58.4 U1.1 ; U1.1@135.3,48.8 135.3,48.774 135.435,48.639 135.656,48.639 136.383,47.912 136.383,46.77 137.064,46.089 137.499,46.089 138.318,45.27 C1.1
  Bottom Layer w0.229: 83.1,70.845 83.1,70.545 ; v1(83.1,83.8) 83.1,70.545 ; v1(133,60.5) 132.1,60.5 130.576,62.024 130.576,62.86 129.647,63.789 128.812,63.789 127.883,64.717 127.883,65.553 125.7,67.737 85.909,67.737 83.1,70.545
NetC1_2: C1.2 R1.2 R2.1 | length 3
  Top Layer w0.229: R2.1 139.649,46.6 R1.2@141,46.6 ; R1.2@141.129,46.6 141.129,45.271 C1.2@141.2,45.2
NetC2_1: "CO Sensor.5" C2.1 U2.1 | length 99.7
  Top Layer w0.229: v1(58.5,84.4) 59.56,85.46 59.56,86.318 60.195,86.954 60.695,86.954 ; v1(128,60.5) 128.162,60.338 U2.1 ; U2.1@128.4,57.6 128.4,57.57 128.497,57.473 128.718,57.473 129.362,56.829 129.362,55.687 129.959,55.09 130.055,55.09 131.095,54.05 C2.1
  Bottom Layer w0.229: v1(58.5,84.4) 58.5,70.628 65.263,63.865 124.491,63.865 125.496,62.86 125.496,62.024 127.02,60.5 v1(128,60.5)
NetC2_2: C2.2 R4.2 R5.1 | length 3
  Top Layer w0.229: R5.1 132.495,55.4 R4.2@133.7,55.4 ; C2.2 133.795,55.395 R4.2@133.8,55.4
NetC3_1: "NO Sensor.2" C3.1 U3.1 | length 44.7
  Top Layer w0.229: 119,85.469 119,79.2 v1(127.4,70.8) ; v1(138.2,60.5) 138.2,57.688 138.081,57.569 138.081,55.664 138.297,55.448 138.643,55.448 U3.1 139.025,55.191 139.235,54.981 139.235,53.385 139.993,52.627 140.893,52.627 C3.1
  Bottom Layer w0.229: v1(127.4,70.8) 130.045,68.155 130.361,68.155 132.963,65.553 132.963,64.717 133.826,63.855 134.661,63.855 135.529,62.987 135.529,62.151 137.18,60.5 v1(138.2,60.5)
NetC3_2: C3.2 R7.2 R8.1 | length 2.7
  Top Layer w0.229: C3.2@141.1,55.1 141.1,56.175 R8.1 142.154,56.346 R7.2@142.3,56.2
NetC4_2: C4.2 R11.2 U5.15 U6.6 | length 47.8
  Top Layer w0.229: U6.6 84.875,41.355 85.6,42.08 85.6,44.3 85.897,44.597 86.191,44.597 86.6,45.006 R11.2@86.6,45.3 ; R11.2@86.7,45.4 86.7,47.775 87.136,48.21 C4.2 88.544,49.5 89.3,49.5 ; 88.944,49.5 103.366,49.5 103.5,49.634 103.5,59.1 105.2,60.8 114.494,60.8 U5.15@115.294,60
NetC5_2: C5.2 R11.1 | length 1.9
  Top Layer w0.229: C5.2 87.965,43.702 88.4,44.137 R11.1@88.4,45.2
NetC6_1: C6.1 R6.1 R12.2 U7.2 U15.2 U15.6 | length 81.3
  Top Layer w0.229: R12.2 79.15,48.05 C6.1@79.3,47.9 ; C6.1 81.649,48.05 81.899,48.3 U7.2@82,48.3 ; v1(80,61.2) 80.807,61.2 U15.2 83.531,60.169 86.1,57.6 U15.6@89.3,57.6 ; v1(81.3,49.2) 81.342,49.158 81.342,48.925 81.867,48.4 U7.2@81.9,48.4 ; U15.6 91.2,55.887 v1(91.2,50.7) ; v1(126.5,53.5) 127.5,53.5 128.1,52.9 R6.1@128.3,53.1
  Bottom Layer w0.229: v1(80,61.2) 78.5,61.2 78.5,54.3 81.3,51.5 v1(81.3,49.2) ; v1(91.2,50.7) 92.498,49.402 92.498,47.962 94.054,46.406 98.672,46.406 98.933,46.668 120.468,46.668 126.5,52.7 v1(126.5,53.5)
NetC6_2: C6.2 R3.1 R12.1 R13.2 | length 84.2
  Top Layer w0.229: v1(73.8,47.6) 73.8,50.2 74.7,51.1 79.118,51.1 79.4,50.818 C6.2@79.4,50.7 ; R13.2@76.6,49.55 R13.2 77.95,49.55 R12.1@78,49.6 ; R12.1 78.054,49.55 78.819,50.314 79.118,50.314 79.3,50.496 C6.2@79.3,50.6 ; v1(85.918,38.782) 85.978,38.782 86.76,38 129.029,38 135,43.97 R3.1
  Bottom Layer w0.229: v1(73.8,47.6) 73.8,46.9 75,45.7 85.5,45.7 85.918,45.282 v1(85.918,38.782)
NetC7_1: C7.1 R15.2 Rg.1 U8.4 | length 13
  Top Layer w0.229: v1(108.8,53.5) 108.8,51.765 108.7,51.665 109.893,50.473 110.898,50.473 111.114,50.688 111.114,51.157 111.248,51.291 Rg.1 ; U8.4 109.625,56.45 110.159,55.915 C7.1@110.5,55.915 ; v1(109.6,55.6) 110.459,55.6 110.593,55.734 110.593,55.973 110.721,56.1 C7.1@110.8,56.1 ; R15.2 111.9,49.541 Rg.1@111.9,51.1
  Bottom Layer w0.229: v1(108.8,53.5) 108.8,54.578 108.7,54.678 109.6,55.578 v1(109.6,55.6)
NetC7_2: C7.2 R16.1 Rg.2 U8.1 | length 13.2
  Top Layer w0.229: U8.1 107.225,58.35 107.918,59.043 108.3,59.043 111.264,59.043 C7.2 ; 108.3,59 108.3,55.839 108.494,55.646 108.494,54.902 110.395,53 R16.1 110.495,52.8 110.495,51.391 Rg.2
NetC8_1: C8.1 R16.2 R17.1 | length 5.7
  Top Layer w0.229: R17.1 111.895,52.8 112.648,52.048 112.648,50.842 113.6,49.89 C8.1
NetC8_2: C8.2 R19.2 U5.1 U9.1 | length 14.5
  Top Layer w0.229: R19.2 108.75,48.058 108.985,48.293 115.2,48.293 ; C8.2@114,52.9 114.055,52.955 U5.1 ; U9.1 114.629,46.825 115.2,47.396 115.2,48.2 115.2,48.294 ; C8.2@114.7,52.4 115.2,51.9 115.2,48.294
NetC9_1: C9.1 C10.1 C13.1 C16.1 R18.1 R20.1 R23.2 R28.1 R30.1 R35.1 R37.1 U10.3 | length 61.9
  Top Layer w0.229: R23.2 91.504,44.071 92.174,43.4 C10.1@92.9,43.4 ; C10.1@93.735,43.014 C10.1 94.493,43.45 94.73,43.687 94.73,44.281 95.249,44.8 U10.3@97.5,44.8 ; U10.3 98.62,44.8 98.806,44.614 98.806,43.994 v1(99.7,43.1) ; R28.1 R30.1@104.75,43.05 ; R20.1 R20.1@104.445,52.65 ; v1(104.6,44.2) 104.605,44.195 104.605,43.79 104.6,43.785 104.6,43.285 104.685,43.2 R30.1@104.8,43.2 ; R30.1 104.945,43.05 105.181,43.285 105.181,44.281 105.9,45 105.9,45.7 C13.1 ; C9.1 105.005,55.545 105.005,53.209 R20.1@104.445,52.65 ; R18.1 105.181,52.65 105.1,52.65 ; C13.1@106.2,46.095 106.2,46.3 C13.1@106.3,46.4 ; v1(106.9,44.2) 106.94,44.2 107,44.26 106.731,44.529 106.731,45.66 C13.1 ; v1(117.5,45.9) 120,45.9 C16.1@120.2,45.7 ; R35.1 120.4,44.182 C16.1@120.4,45.2 ; C16.1@121,45.2 121.057,45.143 125.027,45.143 126.493,46.609 128.314,46.609 129.25,47.545 R37.1 ; R20.1@104.445,52.65 105.1,52.65 ; 105.1,52.65 105.181,52.568 105.181,47.51 106.295,46.395 106.295,46.3 C13.1
  Bottom Layer w0.229: v1(99.7,43.1) 101,44.4 101.2,44.2 v1(104.6,44.2) ; v1(106.9,44.2) 107.045,44.2 107.245,44 116.1,44 116.7,44.6 116.7,45.666 116.934,45.9 v1(117.5,45.9)
NetC9_2: C9.2 R17.2 U9.3 | length 25.6
  Top Layer w0.229: C9.2 105.2,58.35 106.877,60.027 112.332,60.027 112.7,59.658 v1(112.7,56.6) 112.7,55.7 112.4,55.4 111.2,55.4 111.043,55.243 111.043,54.654 110.495,54.654 R17.2 ; v1(112.7,47.7) 112.714,47.686 112.714,46.714 U9.3
  Bottom Layer w0.229: v1(112.7,47.7) v1(112.7,56.6)
NetC10_2: C10.2 R9.1 R22.2 R23.1 | length 53.3
  Top Layer w0.229: R22.2 91.071,45.571 R23.1@91.1,45.6 ; R23.1 91.504,45.571 92.133,46.2 C10.2@92.5,46.2 ; C10.2 93.564,46.15 94.415,47 v1(94.8,47) ; v1(136.5,59.7) 136.545,59.7 137.4,58.845 R9.1@137.4,58.7
  Bottom Layer w0.229: v1(94.8,47) 94.951,47.151 100.49,47.151 109.006,55.667 109.006,55.846 112.661,59.5 125.1,59.5 125.6,59 135.8,59 v1(136.5,59.7)
NetC11_1: C11.1 R24.1 R25.2 U11.4 | length 11.3
  Top Layer w0.229: U11.4 101.695,43.2 102.098,43.602 ; R25.2@102.5,46.795 102.581,46.714 102.581,45.919 103.2,45.3 103.2,44.7 102.2,43.7 102.1,43.6 102.453,43.247 102.453,42.621 102.806,42.268 105.564,42.268 106.283,41.55 R24.1
NetC11_2: C11.2 R24.2 R26.1 U11.1 | length 18.3
  Top Layer w0.229: v1(99.179,46.074) 100.254,45 C11.2 100.489,44.989 100.489,41.343 99.795,40.649 U11.1 ; v1(105.9,44.1) 105.9,44.04 106.047,43.893 106.047,43.285 106.332,43 R24.2@106.4,43 ; R24.2 R26.1
  Bottom Layer w0.229: v1(99.179,46.074) 104.326,46.074 105.9,44.5 v1(105.9,44.1)
NetC12_1: C12.1 R26.2 R27.1 | length 13.5
  Top Layer w0.229: R26.2 108.137,41.55 109.587,40.1 110.7,40.1 ; R27.1 110.77,40.37 110.77,40.17 112.141,38.8 115.6,38.8 117.035,40.235 117.373,40.235 C12.1
NetC12_2: C12.2 R29.2 U5.2 U12.1 | length 20.6
  Top Layer w0.229: R29.2 111.245,43.05 112.166,42.129 113.195,41.1 114.884,41.1 115.018,41.234 115.018,42.214 115.439,42.635 115.539,42.635 116.275,43.37 ; U5.2 115.325,52.458 116.275,51.509 116.275,43.37 ; C12.2 116.275,43.37
NetC13_2: C13.2 R27.2 U12.3 | length 8.3
  Top Layer w0.229: C13.2@109,46.2 109.291,45.909 109.291,44 109.291,43.285 109.527,43.05 R27.2 ; 109.3,44 111.516,44 112.035,43.481 112.373,43.481 113.208,42.646 113.208,42.421 U12.3
NetC14_1: C14.1 R31.1 R32.2 U13.4 | length 10.1
  Top Layer w0.229: U13.4 124.864,40.805 125.593,40.805 126,41.212 R31.1@126,41.3 ; R31.1 126.329,41.34 127.293,40.376 127.348,40.376 127.6,40.123 C14.1@127.6,39.7 ; C14.1@128.8,39.7 128.8,40.357 129.302,40.859 129.302,43.67 129.25,43.722 R32.2
NetC14_2: C14.2 R31.2 R33.1 U13.1 | length 7.6
  Top Layer w0.229: U13.1 122.6,42.841 122.6,43.7 123.1,44.2 125.914,44.2 R33.1@126,44.114 ; R33.1@126.1,44 126.229,43.871 R31.2 127.76,42.84 C14.2@127.8,42.8
NetC15_1: C15.1 R33.2 R34.1 | length 18.5
  Top Layer w0.229: v1(117.3,45) 117.3,45.261 116.906,45.654 116.906,47.706 C15.1@117.8,48.6 ; C15.1 118.781,49.326 120.735,49.326 121,49.591 R34.1@121,49.8 ; v1(125.848,45.124) 126.821,45.124 127.65,44.295 R33.2
  Bottom Layer w0.229: v1(117.3,45) 117.36,45 117.47,44.889 117.511,44.889 117.8,44.6 125.324,44.6 v1(125.848,45.124)
NetC15_2: C15.2 R36.2 U5.3 U14.1 | length 15.8
  Top Layer w0.229: U5.3@116.595,53.905 116.595,52.405 117.1,51.9 118.036,51.9 C15.2 121.065,51.59 121.66,50.995 123.505,50.995 124.8,49.7 124.8,48.831 124.76,48.791 124.76,48.572 U14.1 ; U14.1@124.6,48.361 127.112,48.361 127.75,48.999 R36.2
NetC16_2: C16.2 R34.2 U14.3 | length 3.5
  Top Layer w0.229: C16.2 122.439,48.236 122.5,48.297 U14.3@122.5,48.5 ; R34.2 122.65,49.74 122.65,48.45 U14.3@122.7,48.4
NetC19_1: C19.1 R42.1 R43.2 U16.3 | length 6.1
  Top Layer w0.229: U16.3 68.956,55.135 68.956,55.656 69.9,56.6 R42.1@70.3,56.6 ; R42.1 70.425,56.675 72.075,56.675 72.336,56.414 72.486,56.414 73.215,55.685 73.364,55.685 C19.1@73.6,55.449
NetC20_2: C20.2 Power.1 U17.1 | length 35.2
  Top Layer w0.229: U17.1@59.8,57.7 59.5,57.7 59.3,57.9 59.3,58.517 59.483,58.7 61.55,58.7 64.6,61.75 C20.2 v1(64.9,59.1) ; Power.1@64.2,38.2 64.2,38.275 65.125,39.2 67.1,39.2 67.4,39.5 67.4,43.6 v1(66.8,44.2)
  Bottom Layer w0.229: v1(64.9,59.1) 64.9,55 65.6,54.3 65.6,51.2 66.8,50 v1(66.8,44.2)
"NetCO Sensor1_4": "CO Sensor.4" R5.2 | length 90
  Top Layer w0.229: 60.695,82.954 60.926,82.954 61.561,82.318 v1(61.561,80.187) ; v1(130.5,60.5) 130.5,59.1 132.08,57.52 132.08,57.239 132.315,57.004 R5.2
  Bottom Layer w0.229: v1(61.561,80.187) 61.603,80.145 62.026,80.145 62.7,79.471 62.7,72.127 67.574,67.254 123.643,67.254 125.343,65.553 125.343,64.717 126.206,63.855 127.041,63.855 127.909,62.987 127.909,62.151 129.56,60.5 v1(130.5,60.5)
"NetCO Sensor1_9": "CO Sensor.9" R25.1 | length 46.6
  Top Layer w0.229: 81.4,75 81.6,74.8 82.5,74.8 82.8,74.5 82.8,69.8 85.1,67.5 87.6,67.5 90.8,64.3 v1(90.8,63) ; v1(88.8,48.7) 101.995,48.7 R25.1
  Bottom Layer w0.229: v1(88.8,48.7) 88.8,51.4 90.7,53.3 90.7,62.9 v1(90.8,63)
NetD1_1: D1.1 R40.1 | length 9.2
  Top Layer w0.229: D1.1 61.983,49 67.3,49 68.264,49.964 68.403,49.964 68.7,50.261 R40.1@68.7,50.4
NetD1_2: D1.2 U17.5 | length 6.3
  Top Layer w0.229: U17.5@60.175,55.7 59.725,55.7 58.7,54.675 58.7,53.224 60.6,51.324 D1.2@60.6,51.1
NetD2_1: D2.1 R41.1 | length 5.2
  Top Layer w0.229: D2.1 68,47.75 68.5,48.249 R41.1@68.5,48.6
NetD2_2: D2.2 U17.8 | length 7.6
  Top Layer w0.229: D2.2@64.3,50.9 64.3,51.65 66.4,53.75 66.4,55.8 65.5,56.7 U17.8@65,56.7 ; U17.8@64.425,56.7 U17.8@64.431,56.693
NetJ1_1: J1.1 U4.2 | length 7.2
  Top Layer w0.229: U4.2 95.223,58.323 95.805,58.905 95.805,59.095 95.7,59.2 95.7,60.5 94.996,61.204 94.984,61.204 93.988,62.2 J1.1@93.8,62.2
NetJ1_3: J1.3 U4.15 | length 8.9
  Top Layer w0.229: J1.3@96.3,62.3 96.2,62.2 96.2,60 97.877,58.323 U4.15
NetJ1_5: J1.5 U4.16 | length 5.8
  Top Layer w0.229: J1.5@98.8,62.3 98.75,62.25 98.75,60.15 99.307,59.593 U4.16
NetJ1_19: J1.19 U5.11 | length 6.4
  Top Layer w0.229: J1.19@116.6,62.3 116.609,62.291 116.609,61.291 v1(117.2,60.7) ; v1(120.4,60.6) 120.402,60.598 120.402,59.322 U5.11
  Bottom Layer w0.229: v1(117.2,60.7) 117.26,60.7 117.36,60.6 v1(120.4,60.6)
NetJ1_21: J1.21 U5.12 | length 2.6
  Top Layer w0.229: U5.12@119.135,59.62 119.102,59.652 119.102,62.102 J1.21@119.2,62.2
NetJ1_23: J1.23 U5.13 | length 8.5
  Top Layer w0.229: U5.13@117.865,59.62 117.865,63.865 118,64 118.44,64 118.575,63.865 120.263,63.865 121.4,62.728 J1.23@121.4,62.6
NetJ1_24: J1.24 U5.10 | length 6.2
  Top Layer w0.229: U5.10@121.675,59.62 121.675,60.913 122.087,61.325 122.104,61.325 122.803,62.024 122.803,63.865 122,64.668 J1.24@122,65
NetNO1_4: "NO2 Sensor.4" R2.2 | length 85.7
  Top Layer w0.229: v1(83.7,81) 83.742,81.042 83.742,81.392 85.35,83 85.85,83 85.35,82.5 ; v1(135.6,60.5) 135.6,58.8 135.492,58.692 135.583,58.6 135.583,52.067 139.4,48.25 R2.2
  Bottom Layer w0.229: 83.7,70.928 83.7,70.628 ; v1(83.7,81) 83.7,70.628 ; v1(135.6,60.5) 134.64,60.5 133.116,62.024 133.116,62.86 132.187,63.789 131.352,63.789 130.423,64.717 130.423,65.553 127.757,68.22 86.109,68.22 83.7,70.628
NetNO1_9: "NO2 Sensor.9" R15.1 | length 30.3
  Top Layer w0.229: v1(105.1,61.6) 105.1,66.5 108.6,70 108.6,73.1 107,74.7 107,75 ; v1(107.9,55.4) 107.9,51.917 107.7,51.717 109.545,49.872 110.16,49.872 110.395,49.637 R15.1
  Bottom Layer w0.229: v1(105.1,61.6) 107.9,58.8 v1(107.9,55.4)
"NetNO Sensor1_0": R32.1
"NetNO Sensor1_1": "NO Sensor.1" R8.2 | length 39.2
  Top Layer w0.229: 112.25,78.719 120.762,70.207 130.85,70.207 135.503,65.553 135.503,64.717 136.432,63.789 137.267,63.789 138.196,62.86 138.196,61.905 140.593,59.507 140.593,58.081 140.829,57.846 R8.2
NetR1_1: R1.1 U1.4 | length 4.1
  Top Layer w0.229: U1.4 138.378,46.95 138.911,47.482 140.261,47.482 141,48.221 R1.1@141,48.3
NetR3_2: R3.2 U1.3 | length 1.4
  Top Layer w0.229: R3.2@135.1,45.5 U1.3
NetR4_1: R4.1 U2.4 | length 3.6
  Top Layer w0.229: U2.4 131.355,55.783 131.572,56 131.572,56.006 131.851,56.285 133.027,56.285 133.642,56.9 R4.1@133.7,56.9
NetR6_2: R6.2 U2.3 | length 1.5
  Top Layer w0.229: U2.3 128.245,55.699 R6.2
NetR7_1: R7.1 U3.4 | length 18.5
  Top Layer w0.229: U3.4 136.625,57.091 136.835,56.881 136.835,56.152 138.081,54.906 138.081,52.918 140.099,50.9 142.6,50.9 143.5,51.8 143.5,57.5 143.2,57.8 142.679,57.8 142.633,57.846 R7.1
NetR9_2: R9.2 U3.3 | length 1.9
  Top Layer w0.229: U3.3 139,57.091 139.21,57.302 139.21,58.435 R9.2
NetR10_2: R10.2 U5.4 | length 5.5
  Top Layer w0.229: U5.4 117.865,53.97 118.692,53.142 120.935,53.142 121.877,52.2 R10.2
NetR13_1: R13.1 R14.2 U7.3 | length 11.7
  Top Layer w0.229: R14.2 76.25,48.05 R13.1@76.3,48.1 ; R13.1@76.4,47.8 77.1,47.1 84.2,47.1 84.633,47.533 U7.3
NetR18_2: R18.2 U8.3 | length 5.8
  Top Layer w0.229: R18.2 106.1,51.15 107.1,52.15 U8.3
NetR19_1: R19.1 R20.2 U9.4 | length 21.1
  Top Layer w0.229: v1(103.4,47.4) 103.6,47.4 104.345,48.145 R20.2 ; v1(107.1,50.5) 107.1,48.149 R19.1 107.25,45.85 108.39,44.71 108.43,44.71 108.54,44.6 v1(108.6,44.6) ; v1(109.9,44.6) 112.518,44.6 112.7,44.418 U9.4@112.7,44.2
  Bottom Layer w0.229: v1(103.4,47.4) 105.5,47.4 107.1,49 v1(107.1,50.5) ; v1(108.6,44.6) v1(109.9,44.6)
NetR21_2: R21.2 R22.1 U10.2 | length 8
  Top Layer w0.229: R22.1 90,44.071 91.57,42.5 94.6,42.5 94.844,42.256 94.914,42.256 95,42.17 R21.2@95,42.1 ; R21.2@95.4,42.2 95.4,43.664 95.585,43.85 U10.2
NetR28_2: R28.2 U11.3 | length 2.7
  Top Layer w0.229: U11.3 101.695,39.671 103.01,40.985 103.01,41.314 103.296,41.6 R28.2@103.3,41.6
NetR29_1: R29.1 R30.2 U12.4 | length 13.4
  Top Layer w0.229: R30.2 104.845,40.855 105.7,40 v1(105.8,40) ; R29.1 111.245,41.55 111.481,41.314 111.481,40.934 111.615,40.8 111.7,40.8 111.8,40.8 112,40.8 112.1,40.8 ; v1(112.1,41.3) 112.1,40.8 ; U12.4 113.212,40.017 113.212,40.242 112.654,40.8 112.1,40.8
  Bottom Layer w0.229: v1(105.8,40) 105.7,40 106.1,39.6 110.6,39.6 111.39,40.39 111.48,40.3 112.1,40.92 v1(112.1,41.3)
NetR35_2: R35.2 U13.3 | length 3.3
  Top Layer w0.229: R35.2 120.3,41.6 121.1,40.8 U13.3@122.3,40.8
NetR36_1: R36.1 R37.2 U14.4 | length 8.4
  Top Layer w0.229: U14.4 122.65,46.086 123.873,47.309 127.514,47.309 127.75,47.545 R37.2 ; R37.2@127.85,47.545 127.85,47.845 128.468,48.463 128.468,48.902 128.665,49.099 R36.1
NetR38_1: R38.1 R39.2 U15.3 | length 3.9
  Top Layer w0.229: R39.2 79.8,56.627 R38.1@79.8,57.9 ; R38.1 80.401,57.999 80.7,57.7 81.9,57.7 U15.3@82,57.6 ; R38.1@79.718,58.05 R38.1@79.768,58.1
NetR44_2: R44.2 U17.2 | length 7.2
  Top Layer w0.229: U17.2@59.8,57.206 59.311,57.206 58.8,57.717 58.8,58.7 59.4,59.3 60.25,59.3 62.5,61.55 R44.2 ; U17.2@59.993,57.193 U17.2@60,57.2
NetR45_2: R45.2 U17.4 | length 8.5
  Top Layer w0.229: U17.4@59.9,56.2 58.3,56.2 57.8,56.7 57.8,58.65 60.7,61.55 R45.2
NetRT1_1: RT1.1 U17.9 | length 3.3
  Top Layer w0.229: U17.9 65.866,57.2 66.8,58.134 RT1.1@66.8,58.7 ; RT1.1@66.214,59.214 RT1.1@66.3,59.3
VCC: "O3 Sensor.1" "O3 Sensor.3" C18.2 C19.2 J1.2 R21.1 R38.2 R42.2 U1.5 U2.5 U3.5 U6.2 U8.5 U9.5 U11.5 U12.5 U13.5 U14.5 U15.7 U16.1 | length 30.9
  Top Layer w0.229: v1(69.1,57.6) 69.6,57.6 69.914,57.914 70.064,57.914 70.1,57.95 R42.2@70.1,58.1 ; U16.1 70.195,55.313 70.256,55.374 70.494,55.374 70.92,55.8 v1@71.5,55.8 ; C19.2@74.6,58.2 74.65,58.2 74.835,58.385 74.835,58.635 v1(75.3,59.1) ; C18.2@76,58.2 75.928,58.2 75.743,58.385 75.743,58.657 v1(75.3,59.1) ; v1(77.7,42.6) U6.2@79,42.6 ; R38.2@78.1,58.3 78.017,58.3 77.983,58.335 77.983,58.417 77.3,59.1 v1(75.3,59.1) ; U15.7@89.7,60.1 89.8,60 v1(91.4,60) ; J1.2 93.859,65.059 v1(94.8,66) ; R21.1 96.65,41.964 96.885,42.2 v1(98.1,42.2) 99.585,42.2 99.795,41.989 U11.5 ; v1(109.6,57.5) U8.5@109.6,58.2 ; U9.5@114.7,44.3 114.8,44.2 v1(114.8,43.3) ; U12.5 115.8,39.9 116.258,40.358 116.258,40.398 116.26,40.4 v1@116.3,40.4 ; v1(123.6,45.8) U14.5@124.5,45.8 ; v1(124.9,41.6) U13.5@124.9,42.4 ; v1(130.6,56.7) U2.5@130.6,57.5 ; v1(136.5,53.9) U3.5@136.5,55 ; 136.9,82 v1(136.9,78.7) 136.9,75.4 137,75.3 ; U1.5@137.5,48.8 137.6,48.7 v1(137.6,48)
  other v1: 116.3,40.5 71.6,55.8
pads on no net: "CO Sensor.1" "CO Sensor.2" "CO Sensor.3" "CO Sensor.6" "CO Sensor.7" "CO Sensor.8" "CO Sensor.10" "NO2 Sensor.1" "NO2 Sensor.2" "NO2 Sensor.3" "NO2 Sensor.6" "NO2 Sensor.7" "NO2 Sensor.8" "NO2 Sensor.10" "NO Sensor.3" "O3 Sensor.2" "O3 Sensor.5" "O3 Sensor.6" J1.4 J1.7 J1.8 J1.9 J1.10 J1.11 J1.12 J1.13 J1.14 J1.15 J1.16 J1.17 J1.18 J1.20 J1.22 J1.25 J1.26 J1.27 J1.28 J1.29 J1.30 J1.31 J1.32 J1.33 J1.34 J1.35 J1.36 J1.37 J1.38 J1.39 J1.40 Power.2 Power.3 Power.4 Power.6 Power.7 Power.8 Power.9 Power.10 Power.11 U4.1 U4.3 U4.4 U4.5 U4.6 U4.7 U4.8 U4.9 U4.10 U4.11 U4.12 U4.14 U5.16 U6.1 U6.3 U6.5 U6.7 U6.8 U7.1 U10.1 U15.1 U15.5 U15.8 U16.2 U16.6 U16.7 U16.9 U17.6 U17.11
copper on no net:
  other v2: 61.95,56.1 62.85,56.1 62.4,56.7 61.95,57.3 62.85,57.3

## Polygon pours and split planes (outlines as drawn)
GND on Top Layer "Top Layer-No Net" (solid, pour order 0): 50,93 155,93 155,37 50,37
VCC on Bottom Layer "Top Layer-No Net1" (solid, pour order 1): 50,93 155,93 155,37 50,37

## Text inside footprints (layer, text, board x,y; h text height)
J1: Top Overlay "2" at 91.239,64.689 h1.02; Top Overlay "1" at 91.539,61.989 h1.02; Top Overlay "39" at 143.659,61.989 h1.02; Top Overlay "40" at 143.659,64.689 h1.02